# Altium PCB PCB.PcbDoc (part 2 of 2)
Units mm, origin at the board's own origin, x right, y up, seen from the top; angles counter-clockwise.
Board outline 25.16 x 25.16 mm, 8 copper layers (Top Layer, Mid-Layer 1, Mid-Layer 2, GND, PWR, Mid-Layer 3, Mid-Layer 4, Bottom Layer); 154 components, 133 nets, 602 pads, 294 vias.
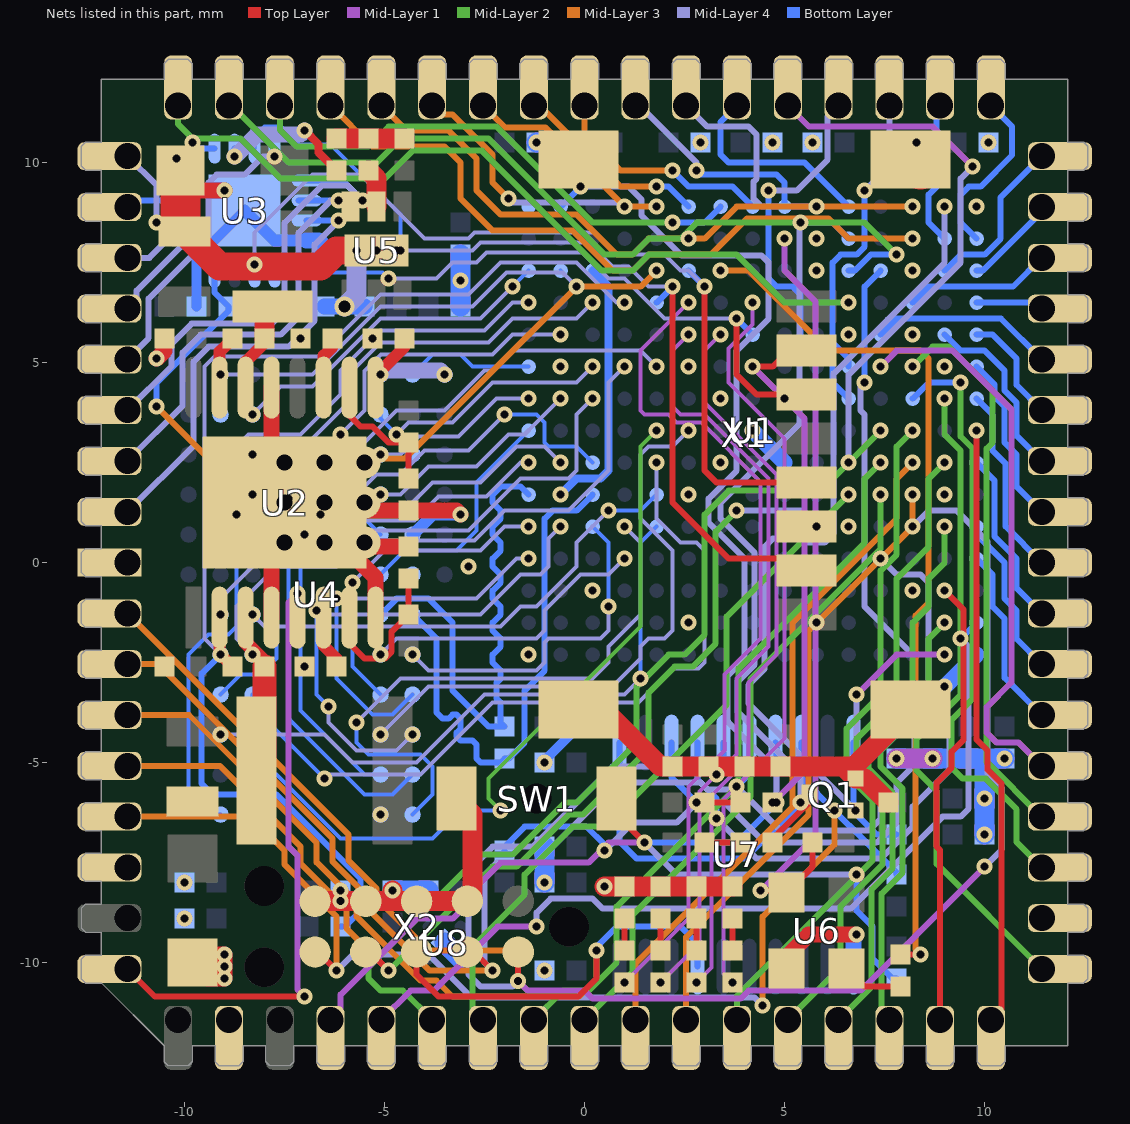
[diagram p8: the nets of this part, all layers, seen from the top]

## Via types
v1: diameter 0.4, hole 0.2, Top Layer to Bottom Layer, tented top, 89 vias
v2: diameter 0.4, hole 0.2, Mid-Layer 4 to Bottom Layer, 66 vias
v3: diameter 0.4, hole 0.2, Top Layer to Bottom Layer, tented both sides, 49 vias
v4: diameter 0.4, hole 0.2, Mid-Layer 4 to Bottom Layer, tented bottom, 41 vias
v5: diameter 0.4, hole 0.2, Top Layer to Mid-Layer 1, 17 vias
v6: diameter 0.8, hole 0.4, Top Layer to Mid-Layer 1, 13 vias
v7: diameter 0.4, hole 0.2, Top Layer to Bottom Layer, tented bottom, 5 vias
v8: diameter 0.4, hole 0.2, Top Layer to Mid-Layer 1, tented top, 4 vias
v9: diameter 0.5, hole 0.3, Top Layer to Bottom Layer, tented both sides, 4 vias
v10: diameter 0.8, hole 0.4, Top Layer to Bottom Layer, tented both sides, 2 vias
v11: diameter 0.8, hole 0.4, Mid-Layer 4 to Bottom Layer, tented bottom, 1 vias
v12: diameter 0.5, hole 0.3, Mid-Layer 4 to Bottom Layer, tented bottom, 1 vias
v13: diameter 0.5, hole 0.3, Top Layer to Bottom Layer, tented bottom, 1 vias
v14: diameter 0.4, hole 0.2, Top Layer to Bottom Layer, 1 vias

## Nets (pads, with @x,y where several pads share a name; then routed paths per layer and width w, separated by ;. In a path a pad name is that pad's centre, name@x,y a point inside that pad or via, vN(x,y) a via of type N, cw(c..) or ccw(c..) an arc to the next point about the centre after c; other vN are vias at no path point) (continued)
A2: U1.H5 U4.L7 | length 18.5
  Mid-Layer 2 w0.1: v3(-2.1,-6.2) -2.4,-5.9 -2.4,-5.4 1.4,-1.6 1.4,2.9 v1(1.8,3.3)
  Bottom Layer w0.1: U4.L7@-8.3,-5.3 -7.7,-5.3 -6.1,-6.9 -3.8,-6.9 -3.1,-6.2 v3(-2.1,-6.2)
A3: U1.K5 U4.M8 | length 21.2
  Mid-Layer 4 w0.1: v4(-8.7,1.2) -8.2,1.2 -7.8,1.6 -7.8,1.8 -7.6,2 -6.5,2 -4.7,3.8 -3.5,3.8 -2.5,4.8 -2.3,4.8 -1.8,5.3 1.4,5.3 v2(1.8,4.9)
  Bottom Layer w0.1: U4.M8@-9.1,-6.3 -9.3,-6.3 -9.9,-5.7 -9.9,-2.3 -9.4,-1.8 -8.9,-1.8 -8.7,-1.6 v4(-8.7,1.2)
A4: U1.E4 U4.M2 | length 14.9
  Mid-Layer 4 w0.1: v4(-5.7,-4) -4.6,-2.9 0.2,-2.9 0.6,-2.5 0.6,-2.1 1.4,-1.3 1.4,0.5 v2(1,0.9)
  Bottom Layer w0.1: v4(-5.7,-4) -5.7,-4.5 -5.4,-4.8 -4.1,-4.8 -3.8,-5.1 -3.8,-5.8 U4.M2@-4.3,-6.3
A5: U1.G2 U4.L3 | length 14.6
  Mid-Layer 4 w0.1: v4(-6.6,1.2) -6.5,1.3 -4.5,1.3 -3.8,2 -2.6,2 -1.7,2.9 -1,2.9 v2(-0.6,2.5)
  Bottom Layer w0.1: v4(-6.6,1.2) -6.6,0.5 -7.1,0 -7.1,-3.7 -5.5,-5.3 U4.L3@-5.1,-5.3
A6: U1.G1 U4.L2 | length 15.2
  Mid-Layer 4 w0.1: v4(-7,0.7) -6.4,0.7 -6.05,1.05 -4.25,1.05 -3.65,1.65 -2.45,1.65 -1.6,2.5 v2(-1.4,2.5)
  Bottom Layer w0.1: v4(-7,0.7) -7.4,0.3 -7.4,-3.9 -5.5,-5.8 -4.8,-5.8 U4.L2@-4.3,-5.3
A7: U1.H6 U4.K3 | length 14.7
  Mid-Layer 4 w0.1: v2(-5.1,-4.3) -3.9,-3.1 0.7,-3.1 1.4,-2.4 1.4,-2.1 1.6,-1.9 2,-1.9 2.2,-1.7 2.2,0.3 1.4,1.1 1.4,2.7 1.6,2.9 2.2,2.9 v2(2.6,3.3)
A8: U1.E2 U4.K2 | length 12.9
  Mid-Layer 4 w0.1: v4(-6.7,-1.2) -6.6,-1.3 -2.6,-1.3 -1.6,-0.3 -1.1,-0.3 -0.9,-0.1 -0.9,0.6 v2(-0.6,0.9) ; v4(-6.4,-3.6) -6.4,-4 -5.7,-4.7 -4.7,-4.7 v2(-4.3,-4.3)
  Bottom Layer w0.1: v4(-6.7,-1.2) -6.7,-3.3 v4(-6.4,-3.6)
A9: U1.E1 U4.J3 | length 8.1
  Mid-Layer 4 w0.1: v4(-5.8,-0.5) -5,0.3 -2.6,0.3 -2,0.9 v2(-1.4,0.9)
  Bottom Layer w0.1: v4(-5.8,-0.5) -5.8,-2.6 U4.J3@-5.1,-3.3
A10: U1.E5 U4.K8 | length 15.6
  Mid-Layer 4 w0.1: v2(-9.1,-4.3) -6.5,-4.3 -5.8,-5 -4.2,-5 -2.5,-3.3 1,-3.3 v4(1.4,-2.9)
  Bottom Layer w0.1: v4(1.4,-2.9) 1.4,0.5 U1.E5@1.8,0.9
A11: U1.D1 U4.J2 | length 9.7
  Mid-Layer 4 w0.1: v4(-6.2,-0.9) -2.7,-0.9 -1.7,0.1 v2(-1.4,0.1)
  Bottom Layer w0.1: v4(-6.2,-0.9) -6.2,-2.9 -5.3,-3.8 -4.8,-3.8 U4.J2@-4.3,-3.3
A12: U1.E3 U4.H2 | length 8.5
  Mid-Layer 4 w0.1: v2(-4.3,-2.3) -3.9,-2.7 -1.2,-2.7 -1,-2.5 -1,-2 -0.9,-1.9 0.4,-1.9 0.6,-1.7 v4(0.6,-1.1)
  Bottom Layer w0.1: U1.E3@0.2,0.9 0.6,0.5 v4(0.6,-1.1)
BA0: U1.G5 U4.J7 | length 19.3
  Mid-Layer 4 w0.1: v4(-6.5,-5.4) -6.4,-5.3 -4.1,-5.3 -2.3,-3.5 1.35,-3.5 2.2,-2.65 2.85,-2.65 3,-2.5 3,0.3 2.8,0.5 2.4,0.5 1.8,1.1 v2(1.8,2.5)
  Bottom Layer w0.1: U4.J7@-8.3,-3.3 -8.3,-3.6 v4(-6.5,-5.4)
BA1: U1.G3 U4.J8 | length 15.2
  Mid-Layer 4 w0.1: v4(-7.4,1.6) -5.8,1.6 -5.2,2.2 -4.6,2.2 -4,2.8 -2.9,2.8 v4(-2,3.7)
  Bottom Layer w0.1: U4.J8@-9.1,-3.3 -8.6,-2.8 -8.1,-2.8 -7.7,-2.4 -7.7,1.3 v4(-7.4,1.6) ; v4(-2,3.7) -1.2,3.7 -1,3.5 -1,3 -0.9,2.9 -0.2,2.9 U1.G3@0.2,2.5
CAS: U1.J3 U4.G8 | length 12.6
  Mid-Layer 4 w0.1: v2(-9.1,-1.3) -9.1,-0.9 -8,0.2 -6.4,0.2 -5.8,0.8 -2.9,0.8 -1.6,2.1 -0.4,2.1 -0.2,2.3 -0.2,3.7 v2(0.2,4.1)
CCLK: R18.1 U1.N12 U7.3 | length 28.1
  Mid-Layer 4 w0.15: v4(0.5,-7.2) 1.2,-6.5 2.3,-6.5 v4(2.8,-6) 3.5,-6 4.5,-7 7.3,-7 7.8,-6.5 7.8,-5.5 8.25,-5.05 8.25,-2.35 7,-1.1 7,3.7 6.9,3.8 6.9,4.4 v4(7,4.5)
  Bottom Layer w0.15: R18.1@-2,-7.2 -2,-7.1 -1.5,-6.6 0.047,-6.6 0.5,-7.053 v4(0.5,-7.2) ; U7.3@2.175,-4.5 2.175,-5.375 v4(2.8,-6) ; v4(7,4.5) 7,6.9 U1.N12@7.4,7.3
CKE: U1.D4 U4.H3 | length 7.4
  Mid-Layer 4 w0.1: v2(-5.1,-2.3) -4.7,-1.9 -1.2,-1.9 -1,-1.7 -1,-1.2 -0.1,-0.3 0.6,-0.3 v2(1,0.1)
CLK: R7.1 U1.F3 U4.G2 | length 13.6
  Bottom Layer w0.15: U4.G2@-4.3,-1.3 -3.7,-1.9 -3.7,-3.75 -3.55,-3.9 -3.4,-3.9 -3.3,-3.8 -3.2,-3.8 -3.1,-3.9 -3.1,-4.15 -3.2,-4.25 -3.2,-4.35 -3.1,-4.45 -2.8,-4.45 -2.7,-4.55 -2.7,-4.9 -2.6,-5 -2.1,-5 R7.1@-2,-4.9 -1.9,-4.9 -1.5,-4.5 -1.5,-3.2 -1,-2.7 -1,1.1 -0.8,1.3 -0.2,1.3 U1.F3@0.2,1.7
CLKN: R7.2 U1.F1 U4.G3 | length 13.5
  Bottom Layer w0.15: U4.G3@-5.1,-1.3 -4.7,-0.9 -3.9,-0.9 -3.3,-1.5 -3.3,-3.2 -2.4,-4.1 R7.2@-2,-4.1 -2.1,-4 -2.1,-3.5 -2.2,-3.4 -2.2,-3 -2.1,-2.9 -2.1,-2.7 -2.3,-2.5 -2.3,-2.3 -2.1,-2.1 -2.1,-1.9 -2.3,-1.7 -2.3,-1.5 -2.1,-1.3 -2.1,-1.1 -2.3,-0.9 -2.3,-0.7 -2.1,-0.5 -2.1,-0.3 -2.3,-0.1 -2.3,0.1 -2.1,0.3 -2.1,0.5 -2.3,0.7 -2.3,0.9 -2.1,1.1 -2.1,1.3 -2.3,1.5 -2.3,1.7 -2.1,1.9 -1.6,1.9 U1.F1@-1.4,1.7
CS: R19.1 U1.M4 U4.H8 | length 29.2
  Mid-Layer 4 w0.1: v2(-9.1,-2.3) -9.5,-1.9 -9.5,4.9 -9.25,5.15 -6.65,5.15 -5.1,6.7 -2.9,6.7 -2.1,7.5 -0.2,7.5 0.8,6.5 v2(1,6.5)
  Bottom Layer w0.15: v2(-9.1,-2.3) -9.575,-2.775 -9.575,-5.525 -9.3,-5.8 -7.7,-5.8 -5.6,-7.9 -5.6,-8.7 -6,-9.1 R19.1@-6.1,-9.1
DIN: U1.P11 U7.1 | length 25.6
  Mid-Layer 4 w0.15: v4(5.4,-6) 5.4,-5.3 3.825,-3.725 3.825,-2.975 4.25,-2.55 4.25,0.25 3.4,1.1 3.4,1.5 5.375,3.475 5.375,8.475 v4(5.4,8.5)
  Bottom Layer w0.15: U7.1@0.875,-4.5 0.875,-6.975 1.3,-7.4 4,-7.4 v4(5.4,-6) ; v4(5.4,8.5) 6.2,8.5 U1.P11@6.6,8.1
DM: U1.H1 U4.F3 | length 5.9
  Bottom Layer w0.1: U4.F3@-5.1,-0.3 -4.5,0.3 -3.2,0.3 -2.7,0.8 -2.7,2 U1.H1@-1.4,3.3
DQ0: U1.N2 U4.A8 | length 10.7
  Mid-Layer 4 w0.1: v2(-9.1,4.7) -6.8,4.7 -5.1,6.4 -2.8,6.4 -1.95,7.25 -0.55,7.25 v4(-0.2,6.9)
  Bottom Layer w0.1: U1.N2@-0.6,7.3 v4(-0.2,6.9)
DQ1: U1.N1 U4.B7 | length 8.4
  Mid-Layer 4 w0.1: v2(-8.3,3.7) -7.6,4.4 -6.8,4.4 -5.1,6.1 -2.6,6.1 v4(-1.8,6.9)
  Bottom Layer w0.1: v4(-1.8,6.9) U1.N1@-1.4,7.3
DQ2: U1.M3 U4.C7 | length 10.5
  Mid-Layer 4 w0.1: v2(-8.3,2.7) -7.2,2.7 -5.8,4.1 -5.8,4.8 -5.1,5.5 -2.4,5.5 -1.8,6.1 -0.2,6.1 v2(0.2,6.5)
DQ3: U1.M1 U4.D7 | length 10.5
  Mid-Layer 4 w0.1: v2(-8.3,1.7) -8.7,2.1 -8.7,2.9 -8.4,3.2 -7.1,3.2 -6.1,4.2 -6.1,4.8 -5.1,5.8 -2.5,5.8 -1.8,6.5 v2(-1.4,6.5)
DQ4: U1.J2 U4.D3 | length 5.5
  Mid-Layer 4 w0.1: v2(-5.1,1.7) -4.6,1.7 -3.9,2.4 -2.7,2.4 -1.9,3.2 -1.5,3.2 v2(-0.6,4.1)
DQ5: U1.J1 U4.C3 | length 4.3
  Mid-Layer 4 w0.1: v2(-5.1,2.7) -4.6,2.7 -4.15,3.15 -3.15,3.15 -2.2,4.1 v2(-1.4,4.1)
DQ6: U1.K3 U4.B3 | length 6.3
  Mid-Layer 4 w0.1: v4(-4.7,3.2) -4.4,3.5 -3.3,3.5 -2.3,4.5 -0.2,4.5 v2(0.2,4.9)
  Bottom Layer w0.1: U4.B3@-5.1,3.7 -5.1,3.6 v4(-4.7,3.2)
DQ7: U1.K1 U4.A2 | length 3.2
  Bottom Layer w0.1: U4.A2@-4.3,4.7 -3.8,5.2 -3.1,5.2 -2.8,4.9 U1.K1@-1.4,4.9
DQS: U1.L2 U4.E3 | length 10
  Mid-Layer 4 w0.1: v4(-6.1,3.2) -5.5,3.8 -5.5,4.795 -5.095,5.2 -2.3,5.2 -1.8,5.7 v2(-0.6,5.7)
  Bottom Layer w0.1: v4(-6.1,3.2) -6.1,1.7 U4.E3@-5.1,0.7
F0: PIN51.60 U1.M11 | length 20
  Mid-Layer 2 w0.15: PIN51.60@-10.16,11.43 -10.16,10.96 -9.8,10.6 -8.6,10.6 -7.6,9.6 -5,9.6 -4.3,10.3 -2.57,10.3 0.43,7.3 1.2,7.3 1.6,7.7 3.8,7.7 5,6.5 v1(6.6,6.5)
F1: PIN50.59 U1.N11 | length 20.8
  Mid-Layer 2 w0.15: PIN50.59@-8.89,11.43 -8.83,11.43 -7.4,10 -5.2,10 -4.6,10.6 -2.4,10.6 0.5,7.7 1.2,7.7 1.6,8.1 2.4,8.1 2.8,8.5 7,8.5 v3(7.8,7.7)
  Bottom Layer w0.15: U1.N11@6.6,7.3 6.754,7.3 7.154,7.7 v3(7.8,7.7)
F2: PIN49.58 U1.R7 | length 13.2
  Mid-Layer 2 w0.15: PIN49.58@-7.62,11.43 -7.62,10.82 -7.2,10.4 -5.4,10.4 -4.9,10.9 -2.2,10.9 0.2,8.5 v3(2.2,8.5)
  Bottom Layer w0.15: v3(2.2,8.5) 3,8.5 U1.R7@3.4,8.9
F3: PIN48.57 U1.P13 | length 17.5
  Mid-Layer 3 w0.15: PIN48.57@-6.35,11.43 -5.32,10.4 -3.5,10.4 -3.1,10 -3.1,9.1 -2.3,8.3 -0.3,8.3 0.7,7.3 1.2,7.3 1.6,7.7 3.154,7.7 4.054,8.6 6.1,8.6 6.6,8.1 v1(8.2,8.1)
F4: PIN47.56 U1.R13 | length 15.8
  Mid-Layer 3 w0.15: PIN47.56@-5.08,11.43 -4.45,10.8 -3.4,10.8 -2.7,10.1 -2.7,9.3 -2.1,8.7 -0.2,8.7 0.8,7.7 1.2,7.7 1.6,8.1 3,8.1 3.8,8.9 v1(8.2,8.9)
F5: PIN46.55 U1.R4 | length 6.3
  Mid-Layer 3 w0.15: PIN46.55@-3.81,11.43 -3.58,11.2 -3.3,11.2 -2.3,10.2 -2.3,9.5 v3(-1.9,9.1)
  Mid-Layer 4 w0.15: v3(-1.9,9.1) -1.8,9 0.9,9 v2(1,8.9)
F6: PIN45.54 U1.R5 | length 5.4
  Mid-Layer 3 w0.15: PIN45.54@-2.54,11.43 -1.985,10.875 -0.975,10.875 1,8.9 v1(1.8,8.9)
F7: PIN44.53 U1.R6 | length 4.9
  Mid-Layer 3 w0.15: PIN44.53@-1.27,11.43 -1.13,11.43 0.9,9.4 v3(1.8,9.4)
  Bottom Layer w0.15: v3(1.8,9.4) 2.1,9.4 U1.R6@2.6,8.9
F8: PIN43.52 U1.R8 | length 5.7
  Mid-Layer 3 w0.15: PIN43.52@0,11.43 0,10.7 0.9,9.8 v3(2.2,9.8)
  Bottom Layer w0.15: v3(2.2,9.8) 2.6,9.4 3.7,9.4 U1.R8@4.2,8.9
F9: PIN42.51 U1.R9 | length 5.2
  Mid-Layer 4 w0.15: PIN42.51@1.27,11.43 1.37,11.43 2.8,10 v4(2.8,9.8)
  Bottom Layer w0.15: v4(2.8,9.8) 2.9,9.7 4.8,9.7 5,9.5 U1.R9@5,8.9
F10: PIN41.50 U1.R10 | length 5.4
  Mid-Layer 4 w0.15: PIN41.50@2.54,11.43 3.07,10.9 4.1,10.9 4.3,10.7 4.3,9.6 4.225,9.525 4.225,9.1 4.425,8.9 v2(5.8,8.9)
F11: PIN40.49 U1.R11 | length 5.1
  Bottom Layer w0.15: PIN40.49@3.81,11.43 3.4,11.02 3.4,10.2 3.6,10 5.5,10 U1.R11@6.6,8.9
F12: PIN39.48 U1.G11 | length 13.9
  Mid-Layer 1 w0.15: PIN39.48@5.08,11.43 5.61,10.9 8.7,10.9 v3(9.7,9.9)
  Mid-Layer 4 w0.15: v2(6.6,2.5) 6.6,4.7 9.4,7.5 9.4,9.6 v3(9.7,9.9)
F13: PIN38.47 U1.J11 | length 9.8
  Mid-Layer 4 w0.15: v4(4.6,9.3) 5.3,9.3 6.075,10.075 6.075,11.155 PIN38.47@6.35,11.43
  Bottom Layer w0.15: v4(4.6,9.3) 4.6,7.1 4.8,6.9 5.2,6.9 5.4,6.7 5.4,5.5 5.6,5.3 6.046,5.3 6.2,5.146 6.2,4.5 U1.J11@6.6,4.1
F14: PIN37.46 U1.K11 | length 7.5
  Mid-Layer 4 w0.15: v4(7,9.3) 7.62,9.92 PIN37.46@7.62,11.43
  Bottom Layer w0.15: U1.K11@6.6,4.9 6.6,5.1 6.2,5.5 6.2,7.5 6.4,7.7 6.8,7.7 7,7.9 v4(7,9.3)
F15: PIN36.45 U1.P14 | length 3.6
  Bottom Layer w0.15: PIN36.45@8.89,11.43 8.8,11.34 8.8,9.4 8.6,9.2 8.6,8.5 U1.P14@9,8.1
F16: PIN35.44 U1.P15 | length 4.4
  Bottom Layer w0.15: U1.P15@9.8,8.1 9.4,8.5 9.4,9.2 9.6,9.4 9.9,9.4 10.69,10.19 10.69,10.9 PIN35.44@10.16,11.43
F17: PIN34.43 U1.N14 | length 4.2
  Bottom Layer w0.15: U1.N14@9,7.3 9.4,7.7 10,7.7 10.4,8.1 10.4,9.13 PIN34.43@11.43,10.16
F18: PIN33.42 U1.N15 | length 2.4
  Bottom Layer w0.15: U1.N15@9.8,7.3 9.954,7.3 11.43,8.776 PIN33.42@11.43,8.89
F19: PIN32.41 U1.M13 | length 3.7
  Bottom Layer w0.15: U1.M13@8.2,6.5 8.6,6.9 10.71,6.9 PIN32.41@11.43,7.62
F20: PIN31.40 U1.M15 | length 1.7
  Bottom Layer w0.15: U1.M15@9.8,6.5 11.28,6.5 PIN31.40@11.43,6.35
F21: PIN30.39 U1.L12 | length 4.6
  Bottom Layer w0.15: U1.L12@7.4,5.7 7.8,6.1 10.41,6.1 PIN30.39@11.43,5.08
F22: PIN29.38 U1.L15 | length 2.8
  Bottom Layer w0.15: U1.L15@9.8,5.7 10.2,5.7 10.8,5.1 10.8,4.44 PIN29.38@11.43,3.81
F23: PIN28.37 U1.L14 | length 4.5
  Bottom Layer w0.15: U1.L14@9,5.7 9.4,5.3 10,5.3 10.5,4.8 10.5,4.3 10.8,4 10.8,3.17 PIN28.37@11.43,2.54
F24: PIN27.36 U1.K15 | length 4.3
  Bottom Layer w0.15: U1.K15@9.8,4.9 10.25,4.45 10.25,4.15 10.5,3.9 10.5,3 10.8,2.7 10.8,1.9 PIN27.36@11.43,1.27
F25: PIN26.35 U1.J15 | length 4.8
  Bottom Layer w0.15: U1.J15@9.8,4.1 10.2,3.7 10.2,2.8 10.525,2.475 10.525,0.905 PIN26.35@11.43,0
F26: PIN25.34 U1.G15 | length 4.4
  Bottom Layer w0.15: U1.G15@9.8,2.5 10.25,2.05 10.25,0.65 10.8,0.1 10.8,-0.64 PIN25.34@11.43,-1.27
F27: PIN24.33 U1.E15 | length 4.1
  Bottom Layer w0.15: U1.E15@9.8,0.9 9.8,0.7 10.5,0 10.5,-0.9 10.8,-1.2 10.8,-1.91 PIN24.33@11.43,-2.54
F28: PIN23.32 U1.D15 | length 4.6
  Bottom Layer w0.15: U1.D15@9.8,0.1 10.2,-0.3 10.2,-1.1 10.5,-1.4 10.5,-2.88 PIN23.32@11.43,-3.81
F29: PIN22.31 U1.K12 | length 14.1
  Mid-Layer 1 w0.15: v1(7.4,4.9) 7.8,5.3 9.2,5.3 10.668,3.832 10.668,-2.997 10.05,-3.615 10.05,-4.25 10.3,-4.5 10.85,-4.5 PIN22.31@11.43,-5.08
F30: PIN21.30 U1.K13 | length 14
  Mid-Layer 2 w0.15: v1(8.2,4.9) 8.7,5.4 9.1,5.4 10.2,4.3 10.2,3 10.05,2.85 10.05,-4.98 11.42,-6.35 PIN21.30@11.43,-6.35
F31: PIN20.29 U1.J13 | length 15.1
  Mid-Layer 2 w0.15: v3(9.4,4.5) 9.4,3.154 9.7,2.854 9.7,-3.4 9.175,-3.925 9.175,-5.125 9.45,-5.4 10.03,-5.4 10.8,-6.17 10.8,-6.99 PIN20.29@11.43,-7.62
  Bottom Layer w0.15: U1.J13@8.2,4.1 8.6,4.5 v3(9.4,4.5)
F32: PIN17.26 U1.H15 | length 15.1
  Top Layer w0.15: v1(9.8,3.3) 9.8,-4.425 10.075,-4.7 10.075,-5.175 10.425,-5.525 10.425,-11.165 PIN17.26@10.16,-11.43
F33: PIN16.25 U1.C14 | length 11.2
  Top Layer w0.15: PIN16.25@8.89,-11.43 8.89,-7.19 8.8,-7.1 8.8,-5.5 9.175,-5.125 9.175,-4.725 9.475,-4.425 9.475,-1.175 v1(9,-0.7)
F34: PIN15.24 U1.B14 | length 11.1
  Mid-Layer 2 w0.15: PIN15.24@7.62,-11.43 7.425,-11.235 7.425,-8.275 7.95,-7.75 7.95,-5.65 7.4,-5.1 7.4,-4.7 8.6,-3.5 8.6,-1.9 v1(9,-1.5)
F35: PIN14.23 U1.E14 | length 13.9
  Mid-Layer 2 w0.15: PIN14.23@6.35,-11.43 7.175,-10.605 7.175,-8.171 7.7,-7.646 7.7,-5.754 7.1,-5.154 7.1,-4.554 8.2,-3.454 8.2,-1.5 8.6,-1.1 8.6,-0.4 9,0 v1(9,0.9)
F36: PIN13.22 U1.G14 | length 16.1
  Mid-Layer 2 w0.15: PIN13.22@5.08,-11.43 6.4,-10.11 6.4,-8.593 7.45,-7.543 7.45,-5.857 6.8,-5.207 6.8,-4.4 7.8,-3.4 7.8,-0.4 8.6,0.4 8.6,2.1 v1(9,2.5)
F37: PIN12.21 U1.H13 | length 17.1
  Mid-Layer 2 w0.15: PIN12.21@3.81,-11.43 3.81,-10.829 7.2,-7.439 7.2,-5.961 6.55,-5.311 6.55,-4.15 7.4,-3.3 7.4,-0.2 7.8,0.2 7.8,2.9 v1(8.2,3.3)
F38: PIN11.20 U1.F13 | length 15.5
  Mid-Layer 3 w0.15: PIN11.20@2.54,-11.43 2.54,-9.36 5.6,-6.3 5.6,-1.7 8.2,0.9 v1(8.2,1.7)
F39: PIN10.19 U1.G13 | length 16.8
  Mid-Layer 3 w0.15: PIN10.19@1.27,-11.43 1.27,-10.03 5.2,-6.1 5.2,-1.5 7.8,1.1 7.8,2.1 v1(8.2,2.5)
F40: PIN9.18 U1.F12 | length 16.2
  Mid-Layer 2 w0.15: PIN9.18@0,-11.43 1.2,-10.23 1.2,-8.8 4.15,-5.85 4.15,-2.904 7.4,0.346 v1(7.4,1.7)
F41: PIN8.17 U1.G12 | length 17.9
  Mid-Layer 2 w0.15: PIN8.17@-1.27,-11.43 -0.54,-10.7 0.1,-10.7 0.8,-10 0.8,-8.6 3.85,-5.55 3.85,-2.65 7,0.5 7,2.1 v1(7.4,2.5)
F42: PIN7.16 U1.F11 | length 17.6
  Mid-Layer 2 w0.15: PIN7.16@-2.54,-11.43 -2.8,-11.17 -2.8,-9.6 -1.5,-8.3 -1.5,-7.8 -0.3,-6.6 0.5,-6.6 3.55,-3.55 3.55,-1.35 v1(6.6,1.7)
F43: PIN6.15 U1.H12 | length 23.2
  Mid-Layer 2 w0.15: PIN6.15@-3.81,-11.43 -4.54,-10.7 -5.1,-10.7 -5.4,-10.4 -5.4,-10.1 -2.6,-7.3 -1.8,-7.3 -0.5,-6 -0.2,-6 1.3,-4.5 1.3,-3.1 2.1,-2.3 2.5,-2.3 3,-1.8 3,1.2 3.6,1.8 5.9,1.8 v1(7.4,3.3)
F44: PIN5.14 U1.B15 | length 22.2
  Mid-Layer 1 w0.15: PIN5.14@-5.08,-11.43 -4.35,-10.7 -3.775,-10.7 -2.175,-9.1 v3(-1.2,-9.1)
  Mid-Layer 4 w0.15: v3(-1.2,-9.1) -1.2,-8.75 -0.85,-8.4 0.2,-8.4 0.45,-8.65 6.65,-8.65 8.95,-6.35 9.4,-6.35 9.6,-6.15 9.6,-2.1 v4(9.4,-1.9)
  Bottom Layer w0.15: v4(9.4,-1.9) U1.B15@9.8,-1.5
FX: PIN18.27 U1.J14 | length 16.2
  Mid-Layer 2 w0.15: v1(9,4.1) 9,3.2 9.4,2.8 9.4,-3.3 8.3,-4.4 8.3,-5.2 8.8,-5.7 8.8,-7.53 PIN18.27@11.43,-10.16
GCLK: R8.2 U1.N7 | length 21.7
  Top Layer w0.15: R8.2@7.9,-9.8 v3(8.4,-9.8)
  Mid-Layer 3 w0.15: v1(3.4,7.3) 4.1,7.3 6.1,5.3 8.4,5.3 8.6,5.1 8.6,-1 8.275,-1.325 8.275,-9.675 v3(8.4,-9.8)
GND: C1.1 C2.2 C3.1 C4.2 C5.1 C6.1 C7.2 C8.2 C9.1 C10.1 C11.1 C12.2 C15.1 C16.2 C18.1 C20.2 C21.1 C23.2 C24.2 C26.2 C27.2 C29.1 C30.1 C31.2 C32.2 C33.2 C37.2 C38.1 C39.2 C41.1 C43.2 C44.1 C45.2 C46.2 C48.1 C49.2 C50.1 C52.1 C53.2 C54.1 C55.2 C56.1 C57.1 C58.1 C59.1 LED1.1 LED2.1 LED3.1 LED4.1 PIN2.11 PIN19.28 PIN60.1 PIN66.7 Q1.2 R4.1 R5.1 SW1.2 U1.A1 U1.A15 U1.B6 U1.B10 U1.C3 U1.C13 U1.E11 U1.F2 U1.F6 U1.F14 U1.G7 U1.G9 U1.H8 U1.J7 U1.J9 U1.K2 U1.K6 U1.K14 U1.L11 U1.L13 U1.N3 U1.N10 U1.N13 U1.P6 U1.P10 U1.R1 U1.R15 U2.4 U2.8 U2.13 U2.17 U3.12 U3.17 U4.A1 U4.A3 U4.B8 U4.C2 U4.D8 U4.E2 U4.F2 U4.M3 U5.3 U5.7 U6.2 U7.11 U8.2 U8.5 X1.0 X1.6 X2.3 X2.5 X2.7 X2.9 | length 87.2
  Top Layer w0.4: v3(-10.7,5.1) -10.5,5.3 C6.1@-10.5,5.6 ; C24.2@-10.1,9.8 -9.6,9.3 v1(-9,9.3) ; U2.4@-7.825,-1.375 -7.825,0.5 -7.825,1.175 v6(-7.5,1.5) ; U2.13@-7.825,4.375 -7.825,2.5 -7.825,1.825 v6(-7.5,1.5) ; U2.8@-5.225,-1.375 -5.225,-0.375 -5.8,0.2 U2.17@-6,0.4 ; R4.1@-4.4,0.4 -5.5,0.4 U2.17@-6,0.4 ; v3(-3.1,1.2) -3.2,1.3 R5.1@-4.4,1.3 -5.5,1.3 -6.5,1.3 U2.17@-7.3,1.3 ; U6.2@5.05,-10.15 5.05,-9.85 5.6,-9.3 v3(6.8,-9.3) ; C32.2@-9.7,-10.1 v8(-9,-10.1) ; C32.2@-9.7,-10.1 -9.4,-10.4 v8(-9,-10.4) v8(-9,-10.1) ; C32.2@-9.7,-10.1 C32.2@-9.8,-10 -9.6,-9.8 v8(-9,-9.8) -9,-10 v8(-9,-10.1) ; v6(-7.5,1.5) U2.17@-7.3,1.3 ; U2.17@-7.3,1.3 v6(-6.5,0.5) -6.4,0.4 U2.17@-6,0.4
  Top Layer w0.5: X2.9@-6.74,-8.465 v8(-6.105,-8.465) X2.7@-5.47,-8.465 -4.835,-8.465 ; C8.2@-6.2,10.6 C56.1@-5.4,10.6 C55.2@-4.5,10.6 ; v1(-4.8,-8.2) -4.8,-8.43 -4.835,-8.465 ; SW1.2@-3.2,-5.9 -2.8,-6.3 -2.8,-8.335 X2.3@-2.93,-8.465 X2.5@-4.2,-8.465 -4.8,-8.465 -4.835,-8.465 ; X1.0@-0.15,-3.675 0.475,-3.675 1.9,-5.1 C33.2@2.2,-5.1 C39.2@3.1,-5.1 C49.2@4,-5.1 C45.2@4.9,-5.1 6.475,-5.1 ; v3(0.5,-8.1) LED1.1@1,-8.1 LED2.1@1.9,-8.1 LED3.1@2.8,-8.1 LED4.1@3.7,-8.1 ; C53.2@7.6,-6 7,-5.4 Q1.2@6.775,-5.4 6.475,-5.1 ; X1.0@8.15,-3.675 6.725,-5.1 6.475,-5.1
  Top Layer w0.7: C2.2@-10.1,8.5 -10.1,8.375 C2.2@-10,8.275 -9.125,7.4 -6.6,7.4 -6.2,7.8 v7(-5.7,7.8) v7(-5.2,7.8)
  Top Layer w1: C2.2@-10.1,8.5 C24.2@-10.1,9.8 ; X1.0@8.15,10.075 X1.0@8.4,9.825
  Mid-Layer 1 w0.5: v1(7.8,-4.9) v1(8.7,-4.9)
  Mid-Layer 4 w0.4: v2(-5.1,4.7) -5,4.8 -3.6,4.8 v1(-3.5,4.7)
  Mid-Layer 4 w0.5: v12(-6,6.4) -5.7,6.7 v7(-5.7,7.8) v7(-5.2,7.8)
  Bottom Layer w0.2: v1(-0.6,1.7) -0.2,2.1 0.4,2.1 0.6,2.3 0.6,6.9 U1.N3@0.2,7.3
  Bottom Layer w0.25: C5.1@-9.7,6.4 -9.7,7.6 U3.17@-8.5,8.8 ; v1(-1,-5) -1,-4.95 -0.2,-4.15 C48.1@-0.2,-4.1
  Bottom Layer w0.3: U3.17@-8.5,8.8 -7.75,8.05 U3.12@-6.95,8.05 ; U4.E2@-4.3,0.7 -3.8,1.2 v3(-3.1,1.2)
  Bottom Layer w0.4: U3.12@-6.95,8.05 -6.65,8.05 -6.4,7.8 v7(-5.7,7.8) v7(-5.2,7.8) ; C20.2@-6.5,6.4 v12(-6,6.4) C27.2@-5.5,6.4 ; v1(4.2,3.3) U1.G9@5,2.5 ; U7.11@6.725,-10.1 6.725,-9.375 v3(6.8,-9.3) ; v7(9,-3.1) U1.A15@9.8,-2.3
  Bottom Layer w0.5: v1(-4.8,-8.2) C10.1@-3.9,-8.2 ; U8.5@-3.5,-9.5 U8.2@-3.1,-9.9 ; C23.2@-3.1,6.4 v3(-3.1,7.05) C38.1@-3.1,7.7 ; v1(-1.2,10.5) C52.1@-0.1,10.5 ; v1(-1,-8) C58.1@-1,-7.1 ; v1(7.8,-4.9) v1(8.7,-4.9) C16.2@9.6,-4.9 10,-4.9 ; v1(10,-6.8) v1(10,-5.9) 10,-4.9 ; v1(10.5,-4.9) 10,-4.9
  other v1: -1,-10.2 2.6,-1.5 0.2,-0.7 8.2,-0.7 6.6,0.9 2.6,1.7 9,1.7 3.4,2.5 3.4,4.1 2.6,4.9 9,4.9 6.6,5.7 8.2,5.7 5.8,7.3 8.2,7.3 5.8,8.1 9.8,8.9 2.9,10.5 4.7,10.5 5.7,10.5 10.1,10.5
  other v2: -10,-8.9 -6.1,-8.2 -10,-8 -5.1,-6.3 -1.4,-2.3 5.8,-1.5 5,4.1 -0.6,4.9 2.6,8.1
  other v3: -2.9,-0.1
  other v5: -7,-2.6 -7.1,5.6 -5.3,5.6 -4.7,7.8
  other v6: -7.5,0.5 -5.5,0.5 -6.5,1.5 -5.5,1.5 -7.5,2.5 -6.5,2.5 -5.5,2.5
  other v14: 8.3,10.5
INIT: PIN65.6 R11.2 U7.8 X2.10 | length 29.8
  Top Layer w0.15: X2.10@-6.74,-9.735 -6.665,-9.735 v3(-6.2,-10.2)
  Mid-Layer 3 w0.15: PIN65.6@-11.43,-6.35 -8.35,-6.35 -7.5,-7.2 -7.5,-7.55 -6.2,-8.85 v3(-6.2,-10.2) ; v3(4.45,-11.075) 4.45,-8.85 6.245,-7.055 v3(6.245,-6.2)
  Mid-Layer 4 w0.15: v3(-6.2,-10.2) -5.8,-9.8 -3.9,-9.8 -2.825,-10.875 4.25,-10.875 v3(4.45,-11.075)
  Bottom Layer w0.15: U7.8@5.425,-4.5 5.425,-5.38 v3(6.245,-6.2) 6.62,-6.575 6.625,-6.575 7.8,-7.75 R11.2@7.8,-7.8
LED1: R13.2 U1.M6 | length 20.9
  Mid-Layer 1 w0.1: v5(1,-10.5) 2.6,-8.9 2.6,-5.6 3.5,-4.7 3.5,-2.8 4.4,-1.9 4.4,2.017 2.917,3.5 2.3,3.5 2.1,3.7 1.5,3.7 1.4,3.8 1.4,5.3 v1(2.6,6.5)
LED2: R14.2 U1.L6 | length 18.8
  Mid-Layer 1 w0.1: v5(1.9,-10.5) 2.875,-9.525 2.875,-5.725 3.8,-4.8 3.8,-2.9 4.6,-2.1 4.6,2.1 3,3.7 2.4,3.7 2.2,3.9 2.2,5.3 v1(2.6,5.7)
LED3: R16.2 U1.L7 | length 17.9
  Mid-Layer 1 w0.1: v5(2.8,-10.5) 3.175,-10.125 3.175,-5.825 4.1,-4.9 4.1,-3 4.8,-2.3 4.8,2.2 3,4 3,5.3 v1(3.4,5.7)
LED4: R17.2 U1.M8 | length 18.6
  Mid-Layer 1 w0.1: v5(3.7,-10.5) 3.475,-10.275 3.475,-5.925 5,-4.4 5,3.1 3.6,4.5 3.6,5.35 4.2,5.95 v1(4.2,6.5)
MISO: U1.M5 U3.7 X1.7 | length 23.2
  Top Layer w0.15: v3(2.2,6.9) 2.2,1.5 3.6,0.1 5.255,0.1 X1.7@5.55,-0.195
  Mid-Layer 4 w0.1: v4(-4.6,7.8) -2.8,7.8 -2.6,8 0.1,8 0.7,7.4 1.1,7.4 1.6,6.9 v3(2.2,6.9)
  Bottom Layer w0.1: U3.7@-8.25,10.35 -8.25,10.65 -8,10.9 -7.595,10.9 -7.145,10.45 -6.35,10.45 -4.6,8.7 v4(-4.6,7.8)
  Bottom Layer w0.15: U1.M5@1.8,6.5 v3(2.2,6.9)
MOSI: U1.L8 U3.13 X1.3 | length 16.5
  Top Layer w0.15: v3(3.8,6.1) 3.8,4.7 4.295,4.205 X1.3@5.55,4.205
  Mid-Layer 4 w0.1: v4(-4.9,7.1) -3.7,7.1 -3.3,7.5 -2.7,7.5 -2.45,7.75 -0.05,7.75 0.6,7.1 1,7.1 2,6.1 v3(3.8,6.1)
  Bottom Layer w0.1: U3.13@-7.75,7.25 -5.05,7.25 v4(-4.9,7.1)
  Bottom Layer w0.15: v3(3.8,6.1) U1.L8@4.2,5.7
NetC8_1: C8.1 U3.6 | length 3.6
  Top Layer w0.2: v3(-7,10.8) -6.992,10.8 -6.65,10.458 -6.65,10.25 C8.1@-6.2,9.8
  Mid-Layer 4 w0.4: v1(-8.75,10.15) -8.2,10.7 -7.1,10.7 v3(-7,10.8)
  Bottom Layer w0.15: v1(-8.75,10.15) U3.6@-8.75,10.35
NetC13_1: C13.1 L1.2 U2.3 | length 4.1
  Top Layer w0.3: C13.1@-8,-2.6 C13.1@-8,-2.5
  Top Layer w0.35: U2.3@-8.475,-1.375 -8.475,-2 -8,-2.475 C13.1@-8,-2.5
  Top Layer w0.6: L1.2@-8.2,-5.2 -8,-5 C13.1@-8,-2.6
NetC13_2: C13.2 U2.2 | length 1.4
  Top Layer w0.3: U2.2@-9.125,-1.375 -9.125,-2.275 C13.2@-8.8,-2.6
NetC14_1: C14.1 L2.2 U2.14 | length 2.3
  Top Layer w0.3: U2.14@-8.475,4.375 -8.475,5.025 -8,5.5 C14.1@-8,5.6
  Top Layer w0.5: C14.1@-8,5.6 -8,6.2 L2.2@-7.8,6.4
NetC14_2: C14.2 U2.15 | length 1.4
  Top Layer w0.3: U2.15@-9.125,4.375 -9.125,5.275 C14.2@-8.8,5.6
NetC29_2: C29.2 U2.6 | length 1.4
  Top Layer w0.3: U2.6@-6.525,-1.375 -6.525,-2.075 -6.2,-2.4 C29.2@-6.2,-2.6
NetC30_2: C30.2 U2.11 | length 1.3
  Top Layer w0.3: U2.11@-6.525,4.375 -6.525,5.175 -6.3,5.4 C30.2@-6.3,5.6
NetC37_1: C37.1 U2.9 | length 1.5
  Top Layer w0.3: U2.9@-5.225,4.375 -5.225,4.675 -4.5,5.4 C37.1@-4.5,5.6
NetC56_2: C56.2 U5.2 | length 1
  Top Layer w0.5: C56.2@-5.4,9.8 -5.2,9.6 U5.2@-5.2,8.9
NetLED1_2: LED1.2 R13.1 | length 0.8
  Top Layer w0.15: R13.1@1,-9.7 LED1.2@1,-8.9
NetLED2_2: LED2.2 R14.1 | length 0.8
  Top Layer w0.15: R14.1@1.9,-9.7 LED2.2@1.9,-8.9
NetLED3_2: LED3.2 R16.1 | length 0.8
  Top Layer w0.15: R16.1@2.8,-9.7 LED3.2@2.8,-8.9
NetLED4_2: LED4.2 R17.1 | length 0.8
  Top Layer w0.15: R17.1@3.7,-9.7 LED4.2@3.7,-8.9
NetLED5_1: LED5.1 Q1.3 | length 1.6
  Top Layer w0.15: LED5.1@4.7,-7 4.7,-6.9 5.625,-5.975 Q1.3@5.625,-5.8
NetLED5_2: LED5.2 R15.1 | length 0.9
  Top Layer w0.15: R15.1@3,-7 LED5.2@3.9,-7
NetLED6_2: LED6.2 R12.2 | length 0.9
  Top Layer w0.15: R12.2@3,-6 LED6.2@3.9,-6
NetQ1_1: Q1.1 R10.2 U1.R14 U7.10 | length 22.2
  Mid-Layer 4 w0.15: v7(6.775,-6.2) 4.1,-3.525 4.1,-3.054 4.5,-2.654 4.5,0.4 4.7,0.6 5.4,0.6 5.5,0.5 6,0.5 6.225,0.725 6.225,4.725 7.575,6.075 9,7.499 v2(9,8.9)
  Bottom Layer w0.15: U7.10@6.725,-4.5 6.725,-6.2 6.725,-6.225 6.737,-6.237 7.3,-6.8 R10.2@7.8,-6.8
NetR2_1: R2.1 R4.2 U2.7 | length 3.9
  Top Layer w0.15: U2.7@-5.875,-1.375 -5.875,-2.025 -5.5,-2.4 -5,-2.4 -4.825,-2.225 -4.825,-1.725 R2.1@-4.4,-1.3 R4.2@-4.4,-0.4
NetR3_1: R3.1 R5.2 U2.10 | length 3.4
  Top Layer w0.15: U2.10@-5.875,4.375 -5.875,3.675 -5.6,3.4 -5.3,3.4 -4.9,3 R3.1@-4.4,3 R5.2@-4.4,2.1
NetR8_1: R8.1 U6.3 | length 1.5
  Top Layer w0.15: U6.3@6.55,-10.15 7,-10.6 R8.1@7.9,-10.6
NetU1_D12: U1.D12 U7.4 | length 15.9
  Mid-Layer 4 w0.15: v4(3.3,-6.4) 4.3,-7.4 7.4,-7.4 8.2,-6.6 8.2,-6.1 9.125,-5.175 9.125,-3.925 8.6,-3.4 8.6,-0.5 8.4,-0.3 7.8,-0.3 v2(7.4,0.1)
  Bottom Layer w0.15: U7.4@2.825,-4.5 2.825,-5.425 3.3,-5.9 v4(3.3,-6.4)
P0: PIN52.61 U3.2 | length 2.6
  Mid-Layer 4 w0.15: PIN52.61@-11.43,10.16 -10.7,9.43 v4(-10.7,8.5)
  Bottom Layer w0.15: v4(-10.7,8.5) -10.65,8.55 U3.2@-10.05,8.55
P1: PIN53.62 U3.3 | length 1.4
  Bottom Layer w0.15: PIN53.62@-11.43,8.89 -11.27,9.05 U3.3@-10.05,9.05
P2: PIN54.63 U3.4 | length 3.9
  Mid-Layer 4 w0.15: PIN54.63@-11.43,7.62 -10.88,7.62 -10.2,8.3 v4(-10.2,10.1)
  Bottom Layer w0.15: v4(-10.2,10.1) -10.05,9.95 U3.4@-10.05,9.55
P3: PIN55.64 U3.5 | length 5.4
  Mid-Layer 4 w0.15: PIN55.64@-11.43,6.35 -11.2,6.58 -11.2,6.8 -9.8,8.2 v4(-9.8,10.5)
  Bottom Layer w0.15: v4(-9.8,10.5) -9.65,10.35 U3.5@-9.25,10.35
P4: PIN56.65 U3.8 | length 7.2
  Mid-Layer 4 w0.15: PIN56.65@-11.43,5.08 -10.9,5.61 -10.9,6.6 -9.4,8.1 -9.4,9.5 -9.2,9.7 -8.5,9.7 -8.05,10.15 v2(-7.75,10.15)
P5: PIN57.66 U3.9 | length 11.6
  Mid-Layer 4 w0.15: PIN57.66@-11.43,3.81 -10.325,4.915 -10.325,5.475 -9.825,5.975 -7.825,5.975 -7.5,6.3 -7.5,8.5 -6.575,9.425 -5.925,9.425 v4(-5.55,9.05)
  Bottom Layer w0.15: U3.9@-6.95,9.55 -6.05,9.55 v4(-5.55,9.05)
P6: PIN58.67 U3.10 | length 11
  Mid-Layer 4 w0.15: PIN58.67@-11.43,2.54 -10.05,3.92 -10.05,5.25 -9.6,5.7 -7.6,5.7 -7.15,6.15 -7.15,8.25 -6.35,9.05 v4(-6.15,9.05)
  Bottom Layer w0.15: U3.10@-7.15,9.05 U3.10@-6.95,9.05 v4(-6.15,9.05)
P7: PIN59.68 U3.11 | length 11.4
  Mid-Layer 4 w0.15: PIN59.68@-11.43,1.27 -9.775,2.925 -9.775,5.025 -9.4,5.4 -7.4,5.4 -6.75,6.05 -6.75,7.95 v4(-6.15,8.55)
  Bottom Layer w0.15: U3.11@-6.95,8.55 v4(-6.15,8.55)
PWRON: PIN68.9 U2.5 | length 15
  Top Layer w0.15: PIN68.9@-11.43,-10.16 -10.74,-10.85 v3(-7,-10.85)
  Mid-Layer 1 w0.15: v5(-7.175,-0.775) -7.4,-1 -7.4,-7.1 -7.175,-7.325 -7.175,-10.675 v3(-7,-10.85)
RAS: U1.K4 U4.H7 | length 14.8
  Mid-Layer 4 w0.1: v2(-8.3,-2.3) -8.7,-1.9 -8.7,-1.1 -7.7,-0.1 -6.2,-0.1 -5.55,0.55 -2.75,0.55 -2,1.3 -0.4,1.3 0.6,2.3 0.6,4.5 v2(1,4.9)
SCLK: U1.N6 U3.14 X1.5 | length 21.8
  Top Layer w0.15: v3(3,6.9) 3,2.3 3.295,2.005 X1.5@5.55,2.005
  Mid-Layer 4 w0.1: v2(-8.25,7.45) -8.25,8.25 -6.8,9.7 -5.6,9.7 -4,8.1 -2.9,8.1 -2.75,8.25 0.25,8.25 0.8,7.7 2,7.7 2.4,7.3 2.6,7.3 v3(3,6.9)
  Bottom Layer w0.15: U1.N6@2.6,7.3 v3(3,6.9)
TCK: PIN62.3 U1.A14 U7.6 X2.4 | length 34.9
  Top Layer w0.15: X2.4@-2.93,-9.735 -2.765,-9.735 v3(-2.3,-10.2)
  Mid-Layer 1 w0.15: v3(6.8,-3.3) 7.8,-2.3 v1(9,-2.3)
  Mid-Layer 3 w0.15: PIN62.3@-11.43,-2.54 -10.66,-2.54 -6.3,-6.9 -6.3,-7.475 -5.45,-8.325 -5.45,-8.625 -3.875,-10.2 v3(-2.3,-10.2)
  Mid-Layer 4 w0.15: v3(-2.3,-10.2) -2.5,-10 -2.5,-7.8 -2.2,-7.5 -1.2,-7.5 0.8,-5.5 2.9,-5.5 3.075,-5.675 3.725,-5.675 v4(3.8,-5.6) 4.9,-6.7 7.1,-6.7 7.4,-6.4 7.4,-5.5 6.8,-4.9 v3(6.8,-3.3)
  Bottom Layer w0.15: v4(3.8,-5.6) 4.125,-5.275 U7.6@4.125,-4.5
TDI: PIN64.5 U1.E10 X2.8 | length 28
  Top Layer w0.15: X2.8@-5.47,-9.735 -5.365,-9.735 v3(-4.9,-10.2)
  Mid-Layer 2 w0.15: v3(-4.9,-10.2) -2.3,-7.6 -1.7,-7.6 -0.4,-6.3 -0.05,-6.3 1.6,-4.65 1.6,-3.25 2.25,-2.6 2.7,-2.6 3.275,-2.025 3.275,0.775 v3(3.8,1.3)
  Mid-Layer 3 w0.15: PIN64.5@-11.43,-5.08 -9.12,-5.08 -7.1,-7.1 -7.1,-7.525 -5.95,-8.675 -5.95,-9.15 v3(-4.9,-10.2)
  Mid-Layer 4 w0.15: v3(3.8,1.3) 5.4,1.3 v2(5.8,0.9)
TDO: PIN63.4 U7.17 X2.6 | length 25.8
  Top Layer w0.15: X2.6@-4.2,-9.735 -4.2,-10.3 -3.65,-10.85 -0.162,-10.85 0.3,-10.388 v3(0.3,-9.7)
  Mid-Layer 3 w0.15: PIN63.4@-11.43,-3.81 -9.89,-3.81 -6.7,-7 -6.7,-7.493 -5.7,-8.493 -5.7,-8.854 -4.104,-10.45 -3.704,-10.45 -3.304,-10.85 -0.15,-10.85 0.3,-10.4 v3(0.3,-9.7)
  Bottom Layer w0.15: v3(0.3,-9.7) 0.3,-9.6 0.8,-9.1 2.4,-9.1 2.825,-9.525 U7.17@2.825,-10.1
TMS: PIN61.2 U1.E13 U7.5 X2.2 | length 51.3
  Top Layer w0.15: v3(-1.66,-10.46) X2.2@-1.66,-9.735
  Mid-Layer 1 w0.15: v3(-1.66,-10.46) -1.42,-10.7 0,-10.7 0.2,-10.9 3.9,-10.9 4.1,-10.7 6.9,-10.7 v3(10,-7.6)
  Mid-Layer 3 w0.15: PIN61.2@-11.43,-1.27 -5.9,-6.8 -5.9,-7.45 -5.2,-8.15 -5.2,-8.4 -3.9,-9.7 -2,-9.7 -1.66,-10.04 v3(-1.66,-10.46)
  Mid-Layer 4 w0.15: v3(-1.66,-10.46) -1.8,-10.6 -2.6,-10.6 -2.9,-10.3 -2.9,-7.7 -2.3,-7.1 -1.3,-7.1 0.7,-5.1 3.1,-5.1 v4(3.3,-5.3) ; v2(8.2,0.9) 8.6,1.3 9.3,1.3 10.075,0.525 10.075,-0.175 10.075,-5.275 10.425,-5.625 10.425,-7.175 v3(10,-7.6)
  Bottom Layer w0.15: v4(3.3,-5.3) 3.475,-5.125 U7.5@3.475,-4.5
WE: U1.F5 U4.G7 | length 11.9
  Mid-Layer 4 w0.1: v2(-8.3,-1.3) -8,-1.6 -2.1,-1.6 -1.6,-1.1 -1.2,-1.1 -0.2,-0.1 -0.2,0.5 v4(0.6,1.3)
  Bottom Layer w0.1: v4(0.6,1.3) 1.4,1.3 U1.F5@1.8,1.7
~IO: R1.2 U1.N5 U3.16 | length 19.2
  Mid-Layer 3 w0.15: v3(-10.7,3.9) -9.4,2.6 -4.5,2.6 -0.2,6.9 1.4,6.9 v1(1.8,7.3)
  Bottom Layer w0.15: v3(-10.7,3.9) -10.7,4.5 -8.9,6.3 R1.2@-8.9,6.4 -9.25,6.75 U3.16@-9.25,7.25
~NOCLK: R6.2 U1.P9 U6.1 | length 19.4
  Top Layer w0.15: v3(4.4,-8.2) 5,-8.2 U6.1@5.05,-8.25 5.7,-7.6 R6.2@5.7,-7
  Mid-Layer 1 w0.15: v3(4.4,-8.2) 5.775,-6.825 5.775,6.525 5,7.3 v1(5,8.1)
~RESET: PIN4.13 R9.2 SW1.1 U1.R2 U7.7 | length 47.1
  Top Layer w0.15: SW1.1@0.8,-5.9 0.8,-6.5 1,-6.5 v3(1.5,-7)
  Mid-Layer 1 w0.15: PIN4.13@-6.35,-11.43 -6.1,-11.18 -6.1,-10.8 -4.2,-8.9 -3.3,-8.9 -3.1,-8.7 -3.1,-8.5 -2.1,-7.5 0.1,-7.5 0.6,-7 v3(1.5,-7)
  Mid-Layer 4 w0.15: v4(-0.1,9.4) 1.1,9.4 1.425,9.075 1.425,8.675 2.425,7.675 4.425,7.675 4.6,7.5 4.6,6.1 3.8,5.3 3.8,2.3 3.1,1.6 3.1,1 4,0.1 4,-2.4 3.575,-2.825 3.575,-3.975 4.8,-5.2 v4(4.8,-6) ; v3(1.5,-7) 2.3,-7.8 v4(6.8,-7.8)
  Bottom Layer w0.15: U1.R2@-0.6,8.9 v4(-0.1,9.4) ; v3(1.5,-7) 3.8,-7 v4(4.8,-6) 4.8,-4.525 U7.7@4.775,-4.5 ; v4(6.8,-7.8) 6.8,-8.7 7.2,-9.1 7.2,-9.9 7.7,-10.4 R9.2@7.8,-10.4
~SD: LED6.1 U1.K8 X1.2 | length 13.3
  Top Layer w0.15: v1(4.2,4.9) 4.7,4.9 5.105,5.305 X1.2@5.55,5.305
  Mid-Layer 1 w0.15: v1(4.2,4.9) 5.5,3.6 5.5,-5.2 v5(4.7,-6)
pads on no net: SW1.0 U1.A2 U1.A3 U1.A4 U1.A5 U1.A6 U1.A7 U1.A8 U1.A9 U1.A10 U1.A11 U1.A12 U1.A13 U1.B2 U1.B3 U1.B5 U1.B7 U1.B9 U1.B11 U1.B13 U1.C2 U1.C4 U1.C5 U1.C6 U1.C7 U1.C8 U1.C9 U1.C10 U1.C11 U1.C12 U1.C15 U1.D3 U1.D5 U1.D6 U1.D7 U1.D8 U1.D10 U1.D11 U1.D13 U1.E6 U1.E7 U1.E8 U1.E9 U1.F4 U1.F8 U1.F10 U1.F15 U1.H3 U1.H10 U1.H11 U1.J4 U1.K10 U1.L1 U1.L5 U1.L9 U1.L10 U1.M9 U1.M10 U1.N4 U1.N8 U1.N9 U1.P1 U1.P2 U1.P3 U1.P5 U1.P7 U1.R3 U4.B1 U4.B9 U4.C1 U4.C9 U4.D1 U4.D9 U4.E1 U4.E7 U4.E9 U4.F7 U4.F9 U5.5 U7.2 U7.9 U7.12 U7.13 U7.14 U7.15 U7.16 X1.1 X1.8 X2.0

## Polygon pours and split planes (outlines as drawn)
GND on Top Layer "GND-TOP" (solid, remove dead copper, pour order 23): -10.16,-11.43 -6.35,-11.43 -6.25,-11.33 -6.25,-10.5 -7.5,-10.5 -7.5,-8.5 -2.5,-8.5 -2.5,-7.75 -0.75,-7.75 -0.75,-10.5 -6.25,-10.5 -6.25,-11.25 -6.25,-11.33 -6.35,-11.43 11.32,-11.43 11.5,-11.25 11.5,11.5 -11.5,11.5 -11.5,-10.09 -10.16,-11.43
GND on Bottom Layer "GND-B" (solid, remove dead copper, pour order 14): -11.43,11.43 -11.43,-10.16 -10.16,-11.43 11.43,-11.43 11.43,11.43 -11.43,11.43
GND on Mid-Layer 3 "GND-L3" (solid, remove dead copper, pour order 19): -11.43,11.43 -11.43,-10.16 -10.16,-11.43 11.43,-11.43 11.43,11.43 -11.43,11.43
GND on Mid-Layer 4 "3V3-L4" (solid, remove dead copper, pour order 20): -11.43,11.43 -11.43,-10.16 -10.16,-11.43 11.43,-11.43 11.43,11.43 -11.43,11.43
+1V2 on Mid-Layer 1 "1V2-L1" (solid, remove dead copper, pour order 16): -11.43,11.43 -11.43,7.62 -2.54,7.62 -2.54,-4.445 6.985,-4.445 7.62,-3.81 7.62,-0.635 2.54,-0.635 2.54,11.43 -11.43,11.43
GND on Mid-Layer 1 "GND-L1" (solid, remove dead copper, pour order 17): -11.43,6.985 -3.175,6.985 -3.175,-5.08 8.255,-5.08 8.255,0 3.175,0 3.175,11.43 11.43,11.43 11.43,-11.43 -10.16,-11.43 -11.43,-10.16 -11.43,6.985
+3V3 on Mid-Layer 2 "3V3-L2" (solid, remove dead copper, pour order 18): -11.43,11.43 11.43,11.43 11.43,-11.43 -10.16,-11.43 -11.43,-10.16 -11.43,11.43
GND on GND "GND" (solid, remove dead copper, pour order 12): -11.43,11.43 -11.43,-10.16 -10.16,-11.43 11.43,-11.43 11.43,11.43 -11.43,11.43
+3V3 on PWR "PWR" (solid, remove dead copper, pour order 13): -11.43,11.43 -11.43,-10.16 -10.16,-11.43 11.43,-11.43 11.43,11.43 -11.43,11.43

## Silkscreen, mask and mechanical layers (free items; w line width, h text height)
Top Overlay:
  lines w0.35: -11.9,-0.6 -10.825,-0.6 -10.825,0.6 -11.9,0.6
  text "Configum" at 9.8,-10.6 h1.2 r90
  text "24950C1601" at 10.9,-10.9 h1.2 r90
Mechanical 1:
  lines w0.2: -12.09,-10.465 -12.446,-10.465 -12.573,-10.338 -12.573,-9.982 -12.446,-9.855 -12.09,-9.855 ; -12.08,-10.51 -10.51,-12.08 ; -12.08,-9.81 -12.08,-9.24 ; -12.08,-8.54 -12.08,-7.97 ; -12.08,-7.27 -12.08,-6.7 ; -12.08,-6 -12.08,-5.43 ; -12.08,-4.73 -12.08,-4.16 ; -12.08,-3.46 -12.08,-2.89 ; -12.08,-2.19 -12.08,-1.62 ; -12.08,-0.92 -12.08,-0.35 ; -12.08,0.35 -12.08,0.92 ; -12.08,1.62 -12.08,2.19 ; -12.08,2.89 -12.08,3.46 ; -12.08,4.16 -12.08,4.73 ; -12.08,5.43 -12.08,6 ; -12.08,6.7 -12.08,7.27 ; -12.08,7.97 -12.08,8.54 ; -12.08,9.24 -12.08,9.81 ; -12.08,10.51 -12.08,12.08 -10.51,12.08 ; -9.81,-12.08 -9.24,-12.08 ; -9.81,12.08 -9.24,12.08 ; -8.54,-12.08 -7.97,-12.08 ; -8.54,12.08 -7.97,12.08 ; -7.27,-12.08 -6.7,-12.08 ; -7.27,12.08 -6.7,12.08 ; -6,-12.08 -5.43,-12.08 ; -6,12.08 -5.43,12.08 ; -4.73,-12.08 -4.16,-12.08 ; -4.73,12.08 -4.16,12.08 ; -3.46,-12.08 -2.89,-12.08 ; -3.46,12.08 -2.89,12.08 ; -2.19,-12.08 -1.62,-12.08 ; -2.19,12.08 -1.62,12.08 ; -0.92,-12.08 -0.35,-12.08 ; -0.92,12.08 -0.35,12.08 ; 0.35,-12.08 0.92,-12.08 ; 0.35,12.08 0.92,12.08 ; 1.62,-12.08 2.19,-12.08 ; 1.62,12.08 2.19,12.08 ; 2.89,-12.08 3.46,-12.08 ; 2.89,12.08 3.46,12.08 ; 4.16,-12.08 4.73,-12.08 ; 4.16,12.08 4.73,12.08 ; 5.43,-12.08 6,-12.08 ; 5.43,12.08 6,12.08 ; 6.7,-12.08 7.27,-12.08 ; 6.7,12.08 7.27,12.08 ; 7.97,-12.08 8.54,-12.08 ; 7.97,12.08 8.54,12.08 ; 9.24,-12.08 9.81,-12.08 ; 9.24,12.08 9.81,12.08 ; 10.51,-12.08 12.08,-12.08 12.08,-10.51 ; 10.51,12.08 12.08,12.08 12.08,10.51 ; 12.08,-9.81 12.08,-9.24 ; 12.08,-8.54 12.08,-7.97 ; 12.08,-7.27 12.08,-6.7 ; 12.08,-6 12.08,-5.43 ; 12.08,-4.73 12.08,-4.16 ; 12.08,-3.46 12.08,-2.89 ; 12.08,-2.19 12.08,-1.62 ; 12.08,-0.92 12.08,-0.35 ; 12.08,0.35 12.08,0.92 ; 12.08,1.62 12.08,2.19 ; 12.08,2.89 12.08,3.46 ; 12.08,4.16 12.08,4.73 ; 12.08,5.43 12.08,6 ; 12.08,6.7 12.08,7.27 ; 12.08,7.97 12.08,8.54 ; 12.08,9.24 12.08,9.81
Drill Drawing:
  text "PCB parameters:  1.2mm FR-4, ENIG, 1oz, red soldermask" at -35.7,-18.2 h3
  text "black overlay, side plated pins, capped via" at -13.3,-21.3 h3